# Altium PCB busanaliz.PcbDoc
Units mm, origin at the board's own origin, x right, y up, seen from the top; angles counter-clockwise.
Board outline 98.81 x 59.56 mm, 2 copper layers (Top Layer, Bottom Layer); 69 components, 54 nets, 317 pads, 84 vias.
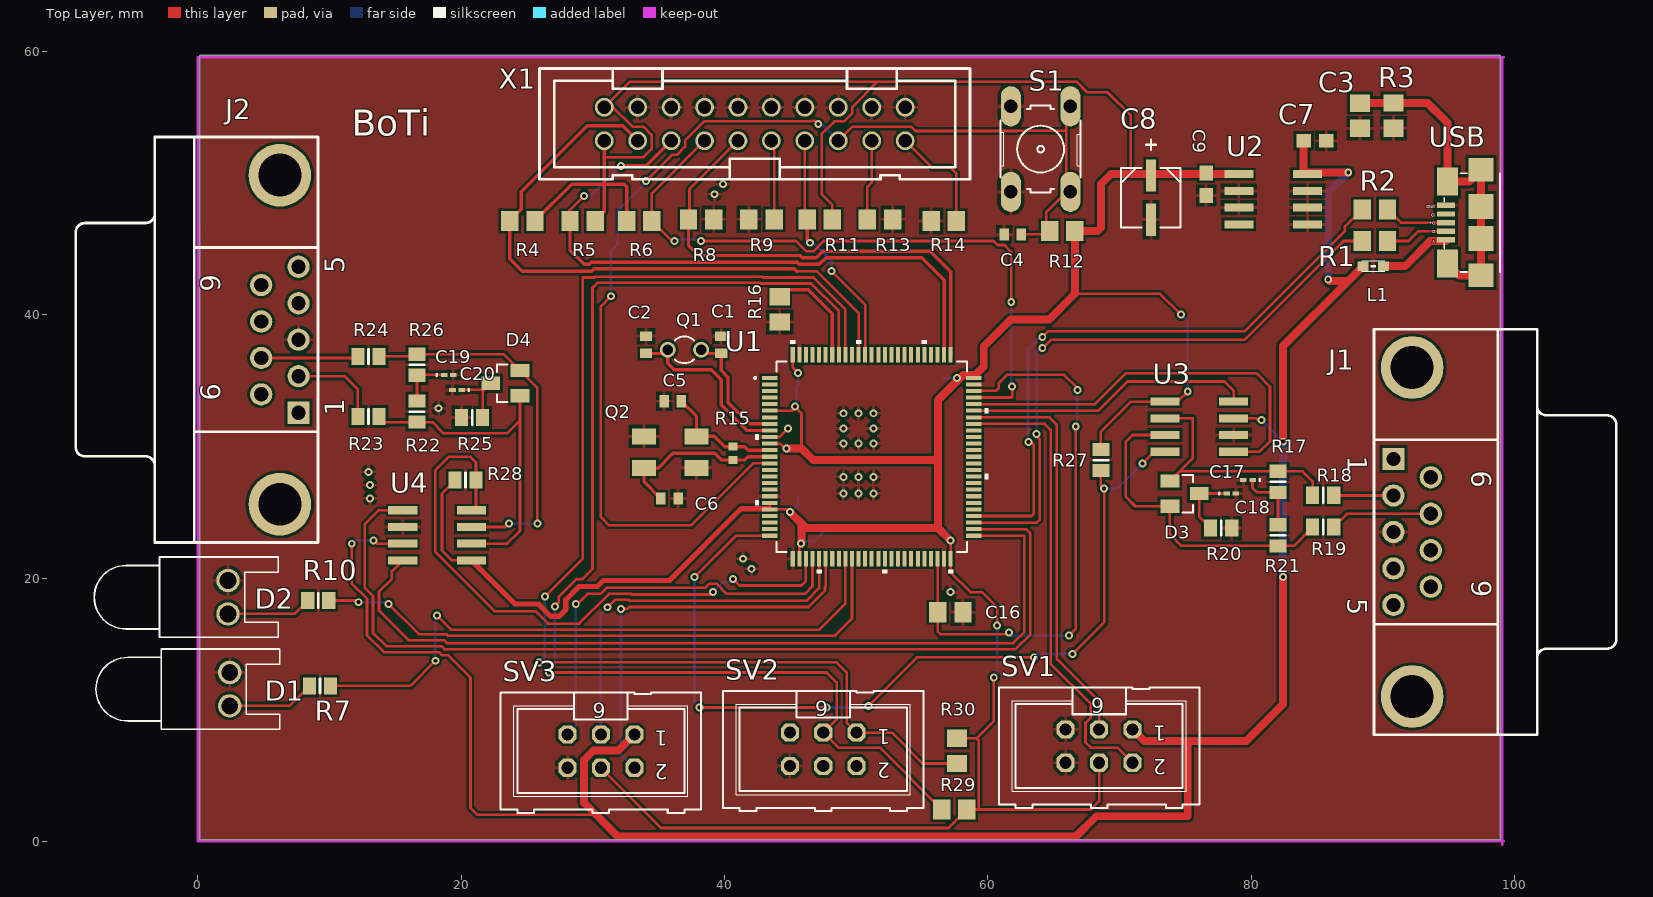
[diagram p0: Top Layer view]
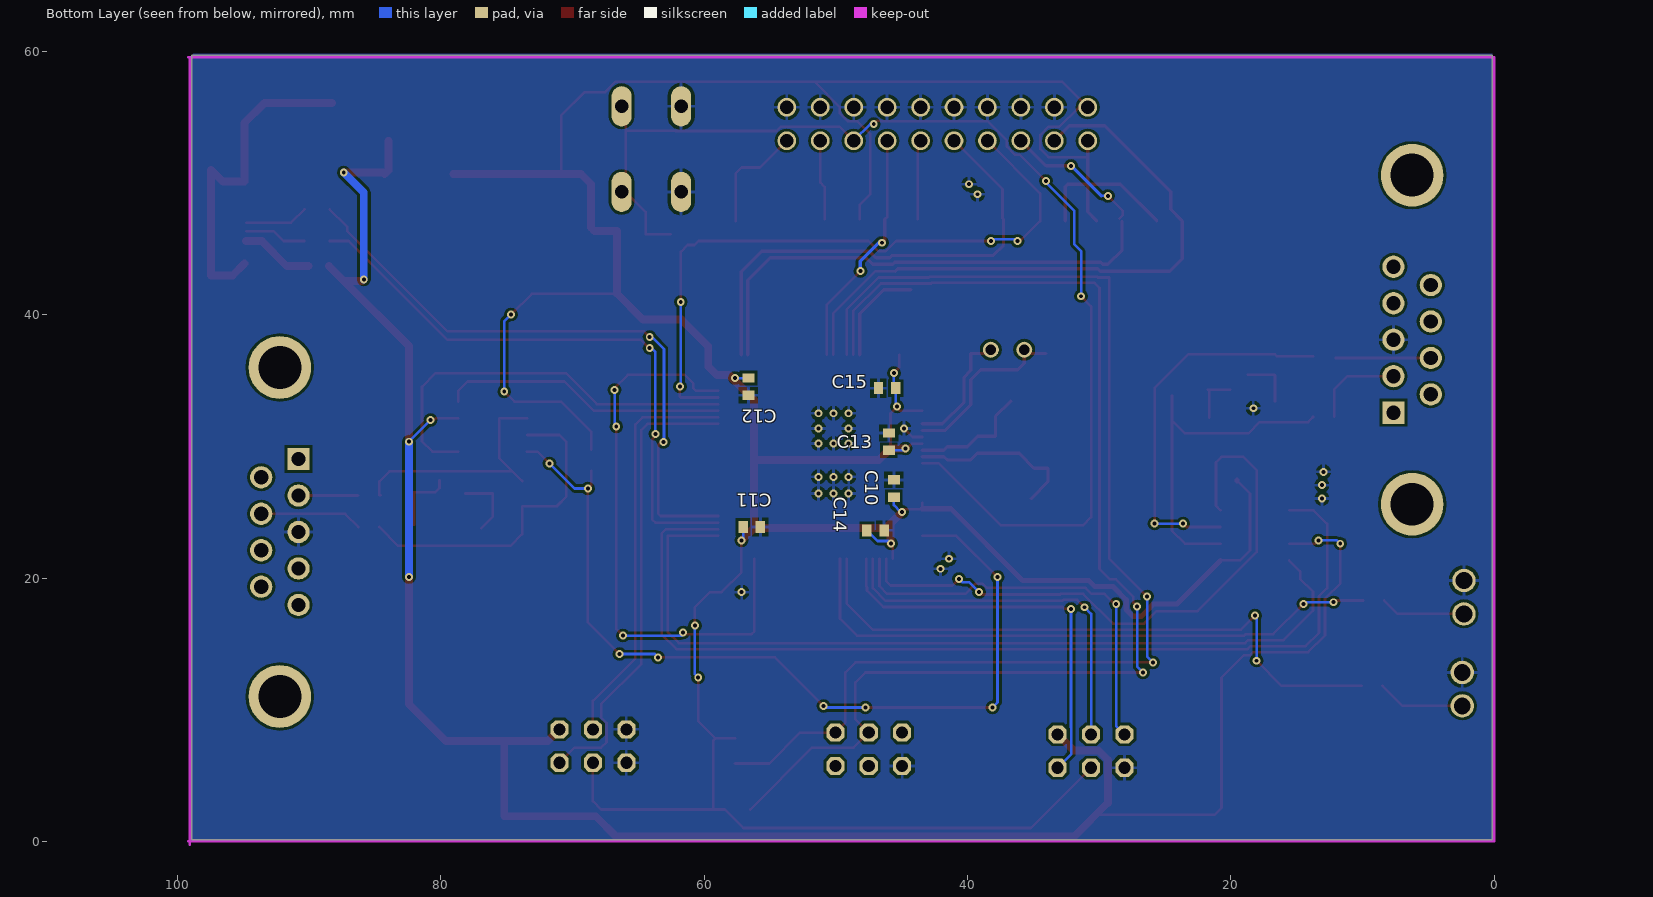
[diagram p1: Bottom Layer view, seen from below]

## Layer stack, top to bottom
Top Solder: solder mask 0.0102, Solder Resist, Dk 3.5
Top Layer: signal copper 0.0356
Dielectric 1: dielectric 0.32, FR-4, Dk 4.8
Bottom Layer: signal copper 0.0356
Bottom Solder: solder mask 0.0102, Solder Resist, Dk 3.5

## Board outline
0.127,0.127 98.933,0.127 98.933,59.69 0.127,59.69

## Design rules (kind name [scope] priority, off if disabled: settings)
Clearance [All] p1: gap=0.2 ignorepadtopadclearanceinfootprint=TRUE
PolygonConnect [All] p1: connectstyle=Relief reliefconductorwidth=0.254 reliefentries=4 polygonreliefangle="90 Angle" airgapwidth=0.254
RoutingVias [All] p1: holewidth=0.3 width=0.6 viastyle="Through Hole" minholewidth=0.3 minwidth=0.6 maxholewidth=0.3 maxwidth=0.6
SolderMaskExpansion [All] p1: expansion=0.102
Width [All] p1: maxlimit=0.6 minlimit=0.2 preferedwidth=0.2 minimp=50.000000 maximp=50.000000 favimp=50.000000
30 further rules are at their usual default settings.

## Components (designator, comment, footprint, x,y, rotation, side; value= is the part's Value field where it differs from the comment)
C1 "10p" C0402 39.751,37.719 r270 top
C2 "10p" C0402 34.036,37.719 r270 top
C3 "4.7n" C0805 88.265,55.118 r270 top
C4 "100n" C0402 61.9,46.101 r180 top
C5 "20p" C0402 36.068,33.427 r180 top
C6 "20p" C0402 35.814,26.035 r0 top
C7 "100n" C0603 84.836,53.213 r0 top
C8 "2.2u" CAPAE430X610N 72.39,48.895 r270 top
C9 "100n" C0603 76.581,49.911 r270 top
C10 "100n" C0402 45.593,26.797 r90 bottom
C11 "100n" C0402 56.388,23.876 r180 bottom
C12 "100n" C0402 56.642,34.544 r270 bottom
C13 "100n" C0402 45.974,30.353 r90 bottom
C14 "100n" C0402 46.99,23.622 r180 bottom
C15 "100n" C0402 46.101,34.417 r0 bottom
C16 "2.2u" C0805 57.15,17.399 r0 top
C17 "10n" 0603#1 79.756,27.432 r180 top
C18 "330n" 0603#1 78.486,26.416 r0 top
C19 "10n" 0603#1 19.05,35.433 r0 top
C20 "330n" 0603#1 19.685,34.29 r180 top
D1 "LED0" LED-0 2.413,11.557 r270 top
D2 "LED1" LED-0 2.286,18.542 r270 top
D3 "MMBZ27VCLT1G" SOT23 74.803,26.416 r270 top
D4 "MMBZ27VCLT1G" SOT23 23.495,34.798 r90 top
J1 "DB9 CAN1" DSUB1.385-2H9 101.727,23.495 r270 top
J2 "DB9 CAN2" DSUB1.385-2H9 -3.275,38.1 r90 top
L1 "WE-CBF_0603" 0603#2 89.281,43.688 r180 top
Q1 "32k" TC26V 36.957,37.338 r180 top
Q2 "ABM3B" ABM3B 38.789,31.369 r180 top
R1 "10" R0805 89.408,45.593 r180 top
R2 "10" R0805 89.408,48.006 r180 top
R3 "1M" R0805 90.805,55.118 r90 top
R4 "10k" R0805 24.638,47.117 r0 top
R5 "10k" R0805 29.21,47.117 r0 top
R6 "10k" R0805 33.528,47.117 r180 top
R7 "Res2" 6-0805_L 9.271,11.811 r180 top value=100
R8 "10k" R0805 38.227,47.244 r180 top
R9 "10k" R0805 42.799,47.244 r0 top
R10 "Res2" 6-0805_L 9.144,18.288 r180 top value=100
R11 "10k" R0805 47.244,47.244 r180 top
R12 "10k" R0805 65.659,46.355 r180 top
R13 "10k" R0805 51.816,47.244 r180 top
R14 "10k" R0805 56.642,47.117 r0 top
R15 "1M" R0402 40.64,29.464 r90 top
R16 "10k" R0805 44.196,40.394 r90 top
R17 "Res2" 6-0805_L 82.042,27.305 r90 top value=62
R18 "Res2" 6-0805_L 85.471,26.289 r0 top value=0.100
R19 "Res2" 6-0805_L 85.471,23.876 r0 top value=0.100
R20 "Res2" 6-0805_L 77.724,23.787 r180 top value=470k
R21 "Res2" 6-0805_L 82.042,23.241 r90 top value=62
R22 "Res2" 6-0805_L 16.637,32.639 r270 top value=62
R23 "Res2" 6-0805_L 12.954,32.258 r180 top value=0.100
R24 "Res2" 6-0805_L 12.954,36.83 r180 top value=0.100
R25 "Res2" 6-0805_L 20.828,32.184 r0 top value=470k
R26 "Res2" 6-0805_L 16.637,36.195 r270 top value=62
R27 "Res2" 6-0805_L 68.58,28.956 r90 top value=3.3k
R28 "Res2" 6-0805_L 20.32,27.447 r180 top value=3.3k
R29 "10k" R0805 57.447,2.413 r0 top
R30 "10k" R0805 57.658,6.858 r90 top
S1 "10-XX" B3F-10XX 64.008,52.578 r90 top
SV1 "ML6" ML6 68.453,7.239 r180 top
SV2 "ML6" ML6 47.498,6.985 r180 top
SV3 "ML6" ML6 30.607,6.858 r180 top
U1 "STM32H7x3VIT" LQFP100-14x14mm 51.181,29.21 r0 top value=Value
U2 "KF33D" SO8#1 81.661,48.768 r270 top
U3 "TJA1044" SO8#2 75.946,31.623 r90 top
U4 "TJA1044" SO8#2 18.288,23.114 r270 top
USB "USB_MICROB" USB_MICROB_PACKAGE 94.107,46.99 r90 top
X1 "2520-" PAK100/2500-20 42.291,54.483 r0 top

## Footprints (in the part's own frame and the unit in brackets; to place one, negate y for a bottom-side part, rotate by r counter-clockwise, add the part's x,y. Pads: shape width x height; smd on the part's side, far side on the other; paste and mask are expansions set on the pad)
6-0805_L [mm] "Chip Resistor, Body 2.0x1.2mm, IPC High Density"
  rect 1x1.3 smd: 1(-0.8,0) 2(0.8,0)
  silkscreen extent 0,-0.55 0,0.55, body extent -1.07,-0.7 1.07,0.7, height 0.7
0603#1 [mm] "Chip Inductor, Body 0.6x0.3mm, IPC High Density"
  rect 0.5x0.3 smd: 1(-0.35,0) 2(0.35,0)
  silkscreen extent -0.9,-0.05 -0.9,0.05, body extent -0.33,-0.18 0.33,0.18, height 0.55
0603#2 [mm]
  rect 0.864x0.711 smd: 1(-0.775,0) 2(0.787,0)
  silkscreen extent -0.85,-0.4 0.86,0.41
ABM3B [mil]
  rect 71x48 smd: P$1(36,24) P$2(193,24) P$3(193,119) P$4(36,119)
B3F-10XX [mil]
  oval 120x60 hole 40: 1(-128,89) 2(128,89) 3(-128,-89) 4(128,-89)
  silkscreen extent -130,-120 130,120
C0402 [mil]
  rect 28x36 smd: 1(-25.59,0) 2(26,0)
C0603 [mil]
  rect 44x40 smd: 1(-33.46,0) 2(34,0)
C0805 [mil]
  rect 52x60 smd: 1(-37.4,0) 2(38,0)
CAPAE430X610N [mil]
  rect 97x30 smd: 1(-66,0) 2(66,0)
  silkscreen extent -173,-89 89,89
DSUB1.385-2H9 [mm] "Connector; D Subminiature; 9 Position; Right Angle; Pitch 1.385 mm"
  rect 1.69x1.69 hole 1.09: 1(-5.54,-10.92)
  round 1.69 hole 1.09: 2(-2.77,-10.92) 3(0,-10.92) 4(2.77,-10.92) 5(5.54,-10.92) 6(-4.155,-8.08) 7(-1.385,-8.08) 8(1.385,-8.08) 9(4.155,-8.08)
  round 4.76 hole 3.26: 10(-12.495,-9.5) 11(12.495,-9.5)
  silkscreen extent -15.4,-12.4 15.4,6
LED-0 [mil] "LED; 2 Leads"
  round 70 hole 50: 1(50,0) 2(-50,0)
  silkscreen extent -120,-400 120,150
LQFP100-14x14mm [mil]
  rect 47x12 smd: 1(-305.12,236.22) 2(-305.12,216.54) 3(-305.12,196.85) 4(-305.12,177.17) 5(-305.12,157.48) 6(-305.12,137.8) 7(-305.12,118.11) 8(-305.12,98.43) 9(-305.12,78.74) 10(-305.12,59.06) 11(-305.12,39.37) 12(-305.12,19.69) 13(-305.12,0) 14(-305.12,-19.68) 15(-305.12,-39.37) 16(-305.12,-59.06) 17(-305.12,-78.74) 18(-305.12,-98.43) 19(-305.12,-118.11) 20(-305.12,-137.8) 21(-305.12,-157.48) 22(-305.12,-177.17) 23(-305.12,-196.85) 24(-305.12,-216.54) 25(-305.12,-236.22) 51(305.12,-236.22) 52(305.12,-216.54) 53(305.12,-196.85) 54(305.12,-177.17) 55(305.12,-157.48) 56(305.12,-137.8) 57(305.12,-118.11) 58(305.12,-98.43) 59(305.12,-78.74) 60(305.12,-59.06) 61(305.12,-39.37) 62(305.12,-19.68) 63(305.12,0) 64(305.12,19.68) 65(305.12,39.37) 66(305.12,59.06) 67(305.12,78.74) 68(305.12,98.43) 69(305.12,118.11) 70(305.12,137.8) 71(305.12,157.48) 72(305.12,177.17) 73(305.12,196.85) 74(305.12,216.54) 75(305.12,236.22)
  rect 12x47 smd: 26(-236.22,-305.12) 27(-216.54,-305.12) 28(-196.85,-305.12) 29(-177.17,-305.12) 30(-157.48,-305.12) 31(-137.8,-305.12) 32(-118.11,-305.12) 33(-98.43,-305.12) 34(-78.74,-305.12) 35(-59.06,-305.12) 36(-39.37,-305.12) 37(-19.68,-305.12) 38(0,-305.12) 39(19.68,-305.12) 40(39.37,-305.12) 41(59.06,-305.12) 42(78.74,-305.12) 43(98.43,-305.12) 44(118.11,-305.12) 45(137.8,-305.12) 46(157.48,-305.12) 47(177.17,-305.12) 48(196.85,-305.12) 49(216.54,-305.12) 50(236.22,-305.12) 76(236.22,305.12) 77(216.54,305.12) 78(196.85,305.12) 79(177.17,305.12) 80(157.48,305.12) 81(137.8,305.12) 82(118.11,305.12) 83(98.43,305.12) 84(78.74,305.12) 85(59.06,305.12) 86(39.37,305.12) 87(19.68,305.12) 88(0,305.12) 89(-19.68,305.12) 90(-39.37,305.12) 91(-59.06,305.12) 92(-78.74,305.12) 93(-98.43,305.12) 94(-118.11,305.12) 95(-137.8,305.12) 96(-157.48,305.12) 97(-177.17,305.12) 98(-196.85,305.12) 99(-216.54,305.12) 100(-236.22,305.12)
  silkscreen extent -351,-349 349,349, body extent 0,0 10,10, height 10
ML6 [mil]
  oct 54x54 hole 36: 1(-100,-50) 2(-100,50) 3(0,-50) 4(0,50) 5(100,-50) 6(100,50)
  silkscreen extent -300,-175 300,185
PAK100/2500-20 [mil]
  round 56 hole 40: 1(-450,-50) 2(-450,50) 3(-350,-50) 4(-350,50) 5(-250,-50) 6(-250,50) 7(-150,-50) 8(-150,50) 9(-50,-50) 10(-50,50) 11(50,-50) 12(50,50) 13(150,-50) 14(150,50) 15(250,-50) 16(250,50) 17(350,-50) 18(350,50) 19(450,-50) 20(450,50)
  silkscreen extent -644,-165 644,166
R0402 [mil]
  rect 24x28 smd: 1(-19.68,0) 2(20,0)
R0805 [mil]
  rect 52x60 smd: 1(-37.4,0) 2(38,0)
SO8#1 [mil]
  rect 24x87 smd: 1(-75,-102.36) 2(-25,-102.36) 3(25,-102.36) 4(75,-102.36) 5(75,103) 6(25,103) 7(-25,103) 8(-75,103)
SO8#2 [mil]
  rect 24x87 smd: 1(-80,-107.36) 2(-30,-107.36) 3(20,-107.36) 4(70,-107.36) 5(70,98) 6(20,98) 7(-30,98) 8(-80,98)
SOT23 [mil]
  rect 40x56 smd: 1(-37.4,-38.31) 2(38,-38.31) 3(0,49)
  silkscreen extent -56,-1 56,31
TC26V [mil]
  round 48 hole 32: 1(-50,0) 2(50,0)
  silkscreen extent -28,-40 29,40
USB_MICROB_PACKAGE [mil]
  rect 16x54 smd: D+(0,-26.77) D-(-25.2,-26.77) GND(52,-26.77) ID(26,-26.77) V(-51.18,-26.77)
  rect 83x63 smd: PAD1(-122.05,-31.5) PAD2(123,-31.5)
  rect 71x75 smd: PAD3(-157.48,-131.89) PAD6(158,-131.89)
  rect 75x75 smd: PAD4(-47.24,-131.89) PAD5(48,-131.89)
  silkscreen extent -148,-189 148,-22

## Part data
C1 C2 C4 C5 C6 C10 C11 C12 C13 C14 C15 C17 C18 C19 C20: library part C-EUC0402, "<B>CAPACITOR</B>, European symbol", SPICEPREFIX=C
C3: library part C-EUC0805, "<B>CAPACITOR</B>, European symbol", SPICEPREFIX=C
C7 C9: library part C-EUC0603, "<B>CAPACITOR</B>, European symbol", SPICEPREFIX=C
C8: library part EEE--CASE-B, MPN=EEE-FT0J101AR, PACKAGE=CASE-B, TOLERANCE="±20 %", VOLTAGERATING=6.3V, OC_FARNELL=2065951, OC_NEWARK=73T9146, SUPPLIER=PANASONIC
C16: library part C-EUC0805, SPICEPREFIX=C
D1: "Typical INFRARED GaAs LED", LatestRevisionDate=08-Jul-2005, LatestRevisionNote="Mech Layer 1 removed.", PackageDescription="LED; 2 Leads", PackageReference=LED-0, Published=8-Jun-2000, Publisher="Altium Limited"
D2: library part LED0, "Typical INFRARED GaAs LED", LatestRevisionDate=08-Jul-2005, LatestRevisionNote="Mech Layer 1 removed.", PackageDescription="LED; 2 Leads", PackageReference=LED-0, Published=8-Jun-2000, Publisher="Altium Limited"
J1 J2: library part "D Connector 9", "Receptacle Assembly, 9 Position, Right Angle", PackageDocument=O, DatasheetDocument=1-Sep-1999, Gender=Receptacle, LatestRevisionDate=17-Jul-2002, LatestRevisionNote="Re-released for DXP Platform.", Orientation="Right Angle", PackageReference=788750, Positions=9, Published=15-Jun-2001, Publisher="Altium Limited"
L1: "<b> SMD EMI Suppression Ferrite Beads WE-CBF</b> <p> /  / - Excellent anti-EMI properties <br> / - Low DC-restistance <br> / - Impedances till 3000 ohms <br> / - Rated current up to 6 A<p> /  / -- Reliable Ni-Sn electrodes<br> / -- Perfect as data lined filter and for uncoupling of distribution voltage<br>", MPN=742792695, PACKAGE=IND-0603, OC_FARNELL=1635699, OC_NEWARK=08P2449, SUPPLIER="Wuerth Elektronik"
Q1: library part CRYSTALTC26V, "<b>CRYSTAL</b>", 1=1, 2=2, OC_FARNELL=unknown, OC_NEWARK=unknown
R1 R2 R3 R4 R5 R6 R8 R9 R11 R12 R13 R14 R16 R29 R30: library part R-EU_R0805, "<B>RESISTOR</B>, European symbol"
R7 R10 R17 R18 R19 R20 R21 R22 R23 R24 R25 R26 R27 R28: "Resistor", LatestRevisionDate=17-Jul-2002, LatestRevisionNote="Re-released for DXP Platform.", PackageDescription="Axial Device, Thru-Hole; 2 Leads; 0.4 in Pin Spacing", PackageReference=AXIAL-0.4, Published=8-Jun-2000, Publisher="Altium Limited"
R15: library part R-EU_R0402, "<B>RESISTOR</B>, European symbol"
S1: "<b>OMRON SWITCH</b>", MPN=B3F-1000, OC_FARNELL=176432, OC_NEWARK=36M3542
SV1 SV2 SV3: "<b>HARTING</b>", OC_FARNELL=unknown, OC_NEWARK=unknown
U1: "Imported", MANUFACTURER_PART_NUMBER=stm32h7x3vit, Copyright="Copyright (C) 2016 Accelerated Designs. All rights reserved", RefDes=RefDes, Type=DEV, VENDOR=STMicroelectronics
USB: "This is the hirose ZX62-B-5PA(11) MICRO-USB B Type female connection.", USB=USB
X1: "<b>3M (TM) Pak 100 4-Wall Header</b><p> / Source: 3M", OC_FARNELL=unknown, OC_NEWARK=unknown

## Via types
v1: diameter 0.6, hole 0.3, Top Layer to Bottom Layer, 84 vias

## Nets (pads, with @x,y where several pads share a name; then routed paths per layer and width w, separated by ;. In a path a pad name is that pad's centre, name@x,y a point inside that pad or via, vN(x,y) a via of type N, cw(c..) or ccw(c..) an arc to the next point about the centre after c; other vN are vias at no path point)
+3V3: C8.1 C9.1 C10.1 C11.1 C12.1 C13.1 C14.1 C15.1 R4.2 R5.2 R6.2 R11.1 R12.1 R27.2 R28.2 R29.2 R30.2 SV1.4 SV3.4 U1.6 U1.11 U1.20 U1.21 U1.27 U1.50 U1.75 U1.100 U2.1 U3.5 U4.5 X1.1 X1.2 | length 307.8
  Top Layer w0.2: R28.2@19.52,27.394 18.542,26.416 18.542,22.098 19.304,21.336 U4.5 ; SV3.4 35.179,1.016 57.023,1.016 R29.2@58.412,2.405 ; 30.88,51.962 33.85,51.962 34.466,52.578 34.466,53.654 33.842,54.278 33.016,54.278 31.541,55.753 X1.2 32.815,57.707 51.629,57.707 ; U1.20 43.431,25.262 U1.21 v1@44.894,25.21 ; U1.11 44.212,30.21 44.577,29.845 v1(44.704,29.845) ; U1.6 45.156,32.71 45.339,32.893 v1(45.339,33.02) 45.847,32.512 45.847,29.845 ; U1.100 45.181,35.972 v1(45.593,35.56) ; U1.27 45.681,22.44 45.847,22.606 45.842,22.611 v1(45.799,22.611) ; R11.1 48.194,48.326 47.371,49.149 47.371,53.721 48.338,54.688 49.082,54.688 49.706,55.312 49.706,55.785 51.629,57.707 ; v1(57.15,22.86) 57.023,22.86 57.181,22.702 U1.50 57.181,20.416 58.674,18.923 59.563,18.923 60.706,17.78 v1(60.706,16.383) ; R30.2 59.131,7.823 ; R29.2 59.309,2.413 ; v1(60.452,12.446) 60.452,9.144 59.131,7.823 ; 66.609,41.59 73.091,41.59 v1(74.676,40.005) ; SV1.4 68.453,3.048 67.818,2.413 59.309,2.413 ; R27.2 68.58,31.115 70.866,33.401 U3.5 74.422,33.401 v1(75.184,34.163) ; 70.866,50.673 70.866,55.118 69.088,56.896 67.542,56.896 66.731,57.707 51.629,57.707 ; 59.131,7.823 59.309,7.645 59.309,2.413
  Top Layer w0.254: R4.2 28.397,49.911 30.861,49.911 ; R5.2 30.861,47.803 30.861,49.911 ; X1.1 30.861,49.911 ; R6.2 32.563,49.733 32.385,49.911 30.861,49.911
  Top Layer w0.4: R28.2@19.52,27.394 R28.2 ; U4.5 24.079,18.034 25.858,18.034 26.802,17.09 27.427,17.09 27.948,17.611 27.948,18.346 28.952,19.35 30.335,19.35 30.789,19.804 35.806,19.804 41.264,25.262 U1.21@43.431,25.262
  Top Layer w0.6: v1(44.704,29.845) 45.847,29.845 46.736,28.956 56.216,28.956 ; v1(44.958,25.019) 45.842,24.135 ; v1@45.842,22.611 45.842,24.135 ; v1(57.15,22.86) 56.216,23.794 ; U2.1 70.866,50.673 69.342,50.673 68.58,49.911 68.58,46.609 68.326,46.355 R12.1 66.609,41.59 64.643,39.624 61.722,39.624 59.69,37.592 59.69,36.068 59.038,35.416 58.105,35.416 56.216,33.528 56.216,28.956 ; 45.842,24.135 46.183,23.794 56.216,23.794 ; 56.216,23.794 56.216,28.956
  Bottom Layer w0.2: v1@44.846,29.703 C13.1 ; v1(44.958,25.019) 45.085,25.019 45.593,25.527 C10.1 ; v1(45.339,33.02) 45.451,33.132 C15.1 45.451,34.544 45.593,34.686 v1(45.593,35.56) ; v1(45.799,22.611) 45.999,22.811 46.832,22.811 47.64,23.619 C14.1 ; C12.1@56.657,35.179 v1(57.658,35.179) ; C11.1 57.038,22.972 v1(57.15,22.86) ; v1(60.452,12.446) 60.706,12.7 v1(60.706,16.383) ; v1(74.676,40.005) 75.184,39.497 v1(75.184,34.163)
+5V: C7.1 L1.2 SV1.1 SV3.1 U2.8 U3.3 U4.3 | length 170.4
  Top Layer w0.2: v1(11.684,22.606) 11.684,19.594 12.846,18.432 12.846,15.65 14.126,14.37 18.305,14.37 18.533,14.142 19.005,14.142 20.701,12.446 20.701,2.54 21.209,2.032 29.972,2.032 ; v1(13.335,22.86) 13.589,22.606 U4.3 ; U3.3 80.391,32.131 80.518,32.004 v1(80.772,32.004)
  Top Layer w0.6: SV3.1 31.907,6.888 30.035,6.888 29.337,6.191 29.337,2.921 31.896,0.362 66.692,0.362 68.235,1.905 75.184,1.905 75.184,7.62 ; SV1.1 71.882,7.62 75.184,7.62 ; v1(82.423,20.066) 82.423,10.414 79.629,7.62 75.184,7.62 ; v1(82.423,30.353) 82.423,37.617 87.351,42.545 ; C7.1 83.986,50.964 U2.8 ; U2.8@84.404,50.8 v1(87.376,50.8) ; v1(85.852,42.672) 85.979,42.545 87.351,42.545 ; L1.2 87.351,42.545
  Bottom Layer w0.2: v1(11.684,22.606) 11.938,22.86 v1(13.335,22.86) ; v1(80.772,32.004) v1(82.423,30.353)
  Bottom Layer w0.6: v1(82.423,20.066) v1(82.423,30.353) ; v1(85.852,42.672) 85.852,49.276 v1(87.376,50.8)
CAN1_H: J1.7 R19.2 | length 7.8
  Top Layer w0.2: R19.2 87.275,24.88 J1.7
CAN1_L: J1.2 R18.2 | length 4.5
  Top Layer w0.2: R18.2@86.295,26.265 J1.2
CAN2_H: J2.7 R24.2 | length 7.2
  Top Layer w0.2: J2.7 R24.2@12.039,36.715
CAN2_L: J2.2 R23.2 | length 7
  Top Layer w0.2: J2.2 11.152,35.33 12.154,34.328 R23.2
DGND: C1.1 C2.1 C3.2 C4.2 C5.2 C6.2 C7.2 C8.2 C9.2 C10.2 C11.2 C12.2 C13.2 C14.2 C15.2 C16.2 C17.2 C18.2 C19.2 C20.2 D1.2 D2.2 J1.3 J2.3 Q2.P$2 Q2.P$4 R3.1 R8.1 R9.1 R13.1 R14.1 R16.1 R20.1 R25.1 S1.1 S1.2 SV1.5 SV1.6 SV2.6 SV3.6 U1.10 U1.19 U1.26 U1.49 U1.74 U1.99 U2.2 U2.3 U2.5 U2.6 U2.7 U3.2 U4.2 USB.GND X1.4 X1.6 X1.8 X1.10 X1.12 X1.14 X1.16 X1.18 X1.20 | length 1.7
  Top Layer w0.2: U1.10 44.172,30.71 v1(44.831,31.369)
  other v1: 57.15,18.923 42.037,20.701 41.402,21.463 13.081,26.035 49.022,26.416 50.165,26.416 51.308,26.416 13.081,27.051 49.022,27.686 50.165,27.686 51.308,27.686 12.954,28.067 49.022,30.226 50.165,30.226 51.308,30.226 49.022,31.369 51.308,31.369 49.022,32.512 50.165,32.512 51.308,32.512 18.288,32.893 39.243,49.149 39.878,49.911
FD1_CANRX: U1.70 U3.4 | length 21.8
  Top Layer w0.2: U1.70 68.397,32.71 70.612,34.925 77.978,34.925 78.673,34.23 U3.4
FD1_CANTX: U1.71 U3.1 | length 31.1
  Top Layer w0.2: U1.71 68.135,33.21 70.485,35.56 80.391,35.56 81.426,34.525 81.426,30.372 80.645,29.591 U3.1
FD1_STBM: R27.1 U1.25 U3.8 | length 67.9
  Top Layer w0.2: v1(37.719,20.066) 40.863,23.21 U1.25 ; v1(38.1,10.16) v1(47.752,10.16) ; v1(50.927,10.287) 54.61,13.97 v1(63.5,13.97) ; v1(66.421,14.224) 68.834,16.637 v1(68.834,26.797) 68.58,27.051 R27.1 ; v1(71.755,28.702) 72.644,29.591 U3.8
  Bottom Layer w0.2: v1(37.719,20.066) 37.719,10.541 v1(38.1,10.16) ; v1(47.752,10.16) 50.8,10.16 v1(50.927,10.287) ; v1(63.5,13.97) 63.754,14.224 v1(66.421,14.224) ; v1(68.834,26.797) 69.85,26.797 v1(71.755,28.702)
FD2_CANRX: U1.51 U4.4 | length 66.1
  Top Layer w0.2: U4.4 14.732,20.507 14.732,19.939 13.754,18.961 13.754,17.514 15.99,15.278 18.681,15.278 18.909,15.05 61.912,15.05 62.769,15.906 62.769,23.21 U1.51
FD2_CANTX: U1.52 U4.1 | length 74.8
  Top Layer w0.2: U4.1 13.716,25.146 12.681,24.111 12.681,19.239 13.3,18.62 13.3,15.838 14.314,14.824 18.493,14.824 18.721,14.596 62.101,14.596 63.223,15.718 63.223,23.398 62.911,23.71 U1.52
FD2_STBM: R28.1 U1.28 U4.8 | length 47.6
  Top Layer w0.2: U4.8 21.12,25.489 R28.1 21.12,28.791 20.701,29.21 19.05,29.21 18.034,28.194 18.034,21.964 22.518,17.48 25.628,17.48 26.573,16.536 28.946,16.536 31.206,18.796 32.908,18.796 32.954,18.75 38.943,18.75 v1(39.116,18.923) ; v1(40.64,19.939) 41.148,19.431 45.847,19.431 46.181,19.765 U1.28
  Bottom Layer w0.2: v1(39.116,18.923) 39.878,19.685 40.386,19.685 v1(40.64,19.939)
I2C_SCL: R30.1 SV2.1 U1.92 | length 92.2
  Top Layer w0.2: v1(25.908,13.589) 48.514,13.589 49.276,12.827 49.276,9.017 SV2.1 52.705,8.255 55.052,5.908 R30.1 ; v1(26.352,18.605) 29.237,21.49 29.237,42.826 30.119,42.826 30.165,42.872 42.893,42.872 42.939,42.826 43.098,42.826 43.099,42.827 45.293,42.827 45.294,42.826 46.761,42.826 49.181,40.406 U1.92
  Bottom Layer w0.2: v1(25.908,13.589) 26.352,14.034 v1(26.352,18.605)
I2C_SDA: R29.1 SV2.3 U1.93 | length 91.7
  Top Layer w0.2: v1(26.67,12.827) 47.752,12.827 48.514,12.065 48.514,9.271 SV2.3 48.641,7.112 51.798,7.112 R29.1 ; v1(27.114,17.843) 27.394,18.123 27.394,18.576 28.722,19.904 29.175,19.904 29.972,20.701 29.972,42.037 30.353,42.418 42.705,42.418 42.751,42.372 43.286,42.372 43.287,42.373 45.105,42.373 45.106,42.372 46.573,42.372 48.681,40.264 U1.93
  Bottom Layer w0.2: v1(26.67,12.827) 27.114,13.271 v1(27.114,17.843)
JNTRST: R4.1 U1.90 X1.3 | length 48.3
  Top Layer w0.2: 45.477,43.308 46.989,43.308 50.181,40.116 U1.90
  Top Layer w0.254: X1.3 32.258,54.356 29.591,54.356 24.562,49.327 24.562,47.991 R4.1 23.688,44.257 24.638,43.307 29.92,43.307 30.094,43.482 45.304,43.482 45.477,43.308
JTCLK: R8.2 U1.76 X1.9 | length 36.9
  Top Layer w0.2: R8.2@37.338,47.32 37.338,49.53 X1.9
  Top Layer w0.254: R8.2 37.262,45.288 38.052,44.498 45.725,44.498 45.891,44.331 46.952,44.331 47.452,44.831 55.626,44.831 57.181,43.276 U1.76
JTDI: R5.1 U1.77 X1.5 | length 48.4
  Top Layer w0.2: R5.1@28.448,47.305 28.194,47.559 28.194,47.879 v1(29.337,49.022)
  Top Layer w0.254: R5.1 28.26,44.892 29.329,43.823 29.717,43.823 29.884,43.99 45.514,43.99 45.681,43.823 47.212,43.823 47.712,44.323 54.991,44.323 56.681,42.633 U1.77 ; v1(32.131,51.308) 34.036,51.308 X1.5
  Bottom Layer w0.2: v1(29.337,49.022) 29.845,49.022
  Bottom Layer w0.254: 29.845,49.022 v1(32.131,51.308)
JTDO: R11.2 U1.89 X1.13 | length 18.4
  Top Layer w0.2: X1.13 46.101,47.422 R11.2 ; v1(48.133,43.307) 50.681,40.759 50.681,40.124 U1.89
  Top Layer w0.254: R11.2 46.279,45.669 v1(46.482,45.466)
  Bottom Layer w0.254: v1(46.482,45.466) 46.609,45.593 48.133,44.069 v1(48.133,43.307)
JTMS: R6.1 U1.72 X1.7 | length 51
  Top Layer w0.2: v1(36.195,45.593) 36.002,45.593 R6.1 34.478,49.21 X1.7 ; v1(38.227,45.593) 45.43,45.593 46.211,44.812 46.753,44.812 47.534,45.593 60.434,45.593 60.737,45.29 61.263,45.29 61.777,44.776 v1(61.777,40.966) v1@61.777,40.949 ; U1.72 61.777,33.71 61.849,33.782 v1(61.849,34.544)
  Bottom Layer w0.2: v1(36.195,45.593) 36.322,45.72 38.227,45.72 v1(38.227,45.593) ; v1(61.777,40.966) 61.777,34.616 v1(61.849,34.544) v1@61.976,34.417
LED0: R7.1 U1.34 | length 48.1
  Top Layer w0.2: R7.1 16.129,11.811 v1(18.034,13.716) v1@18.161,13.843 ; v1(18.161,17.145) 19.224,16.082 47.197,16.082 49.181,18.066 U1.34
  Bottom Layer w0.2: v1(18.034,13.716) 18.034,17.018 v1(18.161,17.145)
LED1: R10.1 U1.35 | length 45.9
  Top Layer w0.2: R10.1 12.065,18.288 v1(12.192,18.161) ; v1(14.478,18.034) 16.78,15.732 18.869,15.732 18.974,15.628 48.394,15.628 49.681,16.915 U1.35
  Bottom Layer w0.2: v1(12.192,18.161) 14.351,18.161 v1(14.478,18.034)
NetC1_2: C1.2 Q1.1 U1.8 | length 9.4
  Top Layer w0.254: Q1.1 38.506,37.059 C1.2 39.751,35.77 40.259,35.262 40.259,33.357 41.898,31.718 ; 41.95,31.71 U1.8
NetC2_2: C2.2 Q1.2 U1.9 | length 13.8
  Top Layer w0.254: C2.2 35.408,37.059 Q1.2 35.687,36.322 36.195,35.814 38.989,35.814 39.751,35.052 39.751,33.147 41.688,31.21 U1.9
NetC3_1: C3.1 R3.2 USB.PAD1 USB.PAD2 USB.PAD3 USB.PAD4 USB.PAD5 USB.PAD6 | length 25.6
  Top Layer w0.6: C3.1 90.79,56.068 R3.2 93.396,56.083 94.907,54.572 USB.PAD2 96.568,50.114 USB.PAD6 USB.PAD5 USB.PAD4 USB.PAD3 95.807,42.99 USB.PAD1
NetC5_1: C5.1 Q2.P$1 R15.2 U1.12 | length 9.1
  Top Layer w0.254: C5.1 37.874,32.271 Q2.P$1 39.218,30.759 40.005,29.972 R15.2 41.529,29.972 41.783,29.718 ; 41.791,29.71 U1.12
NetC6_1: C6.1 Q2.P$3 R15.1 U1.13 | length 13.2
  Top Layer w0.254: C6.1 33.887,27.312 Q2.P$3 34.95,28.346 36.068,29.464 39.243,29.464 39.743,28.964 R15.1 41.537,28.964 41.783,29.21 U1.13
NetC16_1: C16.1 U1.48 U1.73 | length 43.9
  Top Layer w0.2: U1.48 56.181,15.955 56.407,15.729 61.449,15.729 v1(61.595,15.875) ; U1.73 60.626,34.21 60.833,34.417 60.833,34.798 61.468,35.433 65.786,35.433 66.802,34.417 v1(66.802,34.29) ; v1(66.167,15.621) 66.675,16.129 v1(66.675,31.496)
  Bottom Layer w0.2: v1(61.595,15.875) 61.595,15.748 61.722,15.621 v1(66.167,15.621) ; v1(66.675,31.496) 66.802,31.623 v1(66.802,34.29)
NetC17_1: C17.1 R17.1 R21.2 | length 5.1
  Top Layer w0.2: C17.1 80.106,26.828 80.429,26.505 R17.1 R21.2
NetC18_1: C18.1 D3.3 R20.2 | length 5.1
  Top Layer w0.2: R20.2 76.048,24.663 D3.3 C18.1
NetC19_1: C19.1 R22.1 R26.2 | length 4
  Top Layer w0.2: R22.1 R26.2 ; R26.2@16.675,35.433 C19.1
NetC20_1: C20.1 D4.3 R25.2 | length 3.9
  Top Layer w0.2: C20.1 21.742,34.29 21.628,34.176 R25.2
NetD1_1: D1.1 R7.2 | length 6.7
  Top Layer w0.2: D1.1 6.947,10.287 R7.2
NetD2_1: D2.1 R10.2 | length 6.5
  Top Layer w0.2: D2.1 7.328,17.272 R10.2
NetD3_1: D3.1 R17.2 R18.1 U3.6 | length 19.2
  Top Layer w0.2: U3.6 75.565,32.131 75.565,29.101 74.569,28.105 ; D3.1 74.569,28.105 ; R18.1@84.582,26.289 R18.1 84.671,27.343 83.909,28.105 R17.2 74.569,28.105
NetD3_2: D3.2 R19.1 R21.1 U3.7 | length 24.9
  Top Layer w0.2: U3.7 70.993,30.861 70.485,30.353 70.485,26.162 71.196,25.451 D3.2 73.83,23.325 74.714,22.441 R21.1 83.236,22.441 R19.1
NetD4_1: D4.1 R22.2 R23.1 U4.6 | length 26
  Top Layer w0.2: R23.1 13.754,32.22 14.135,31.839 R22.2 17.818,31.839 18.669,30.988 23.495,30.988 24.468,31.961 ; U4.6 23.495,22.606 24.468,23.579 24.468,31.961 ; D4.1 24.468,31.961
NetD4_2: D4.2 R24.1 R26.1 U4.7 | length 28.6
  Top Layer w0.2: R24.1 16.472,36.83 R26.1 23.236,36.995 D4.2 25.781,34.45 v1(25.781,24.13) ; U4.7 23.368,23.876 v1(23.622,24.13)
  Bottom Layer w0.2: v1(23.622,24.13) v1(25.781,24.13)
NetL1_1: L1.1 USB.V | length 5.5
  Top Layer w0.6: L1.1 91.694,43.688 93.599,45.593 USB.V@94.787,45.593
NetR1_1: R1.1 USB.D- | length 4.7
  Top Layer w0.2: R1.1 91.948,45.593 92.705,46.35 USB.D-
NetR2_1: R2.1 USB.D+ | length 4.8
  Top Layer w0.2: R2.1 91.374,46.99 USB.D+
NetR9_2: R9.2 X1.11 | length 6.1
  Top Layer w0.2: X1.11 43.764,53.01 R9.2
NetR13_2: R13.2 X1.17 | length 6.1
  Top Layer w0.2: R13.2 50.851,49.708 51.181,50.038 X1.17
NetR14_2: R14.2 X1.19 | length 8.5
  Top Layer w0.2: X1.19 55.753,51.181 57.15,51.181 57.607,50.724 R14.2
NetR16_2: R16.2 U1.94 | length 7.8
  Top Layer w0.254: R16.2@44.291,41.891 46.374,41.891 48.181,40.084 U1.94
RESET: C4.1 R12.2 S1.3 S1.4 U1.14 X1.15 | length 89.9
  Top Layer w0.2: v1(31.369,41.402) 30.607,40.64 30.607,24.638 31.242,24.003 37.465,24.003 42.172,28.71 U1.14 ; v1(34.036,50.165) 36.019,52.148 36.382,52.148 37.006,52.772 37.006,53.245 38.449,54.688 46.542,54.688 46.591,54.737 46.863,54.737 v1(47.117,54.483) ; X1.15 49.706,54.278 54.162,54.278 54.489,53.951 62.21,53.951 62.233,53.975 65.964,53.975 ; C4.1 64.44,46.101 64.44,47.803 65.964,49.327 65.964,53.975 ; S1.4 65.964,55.524 65.964,53.975
  Bottom Layer w0.2: v1(31.369,41.402) 31.369,44.831 31.877,45.339 31.877,47.879 34.163,50.165 v1(34.036,50.165) ; v1(47.117,54.483) 47.371,54.483 X1.15
SPI_MISO: SV3.3 U1.30 | length 28.8
  Top Layer w0.2: v1(31.115,17.78) 31.677,18.342 32.72,18.342 32.793,18.269 46.216,18.269 47.181,19.234 U1.30
  Bottom Layer w0.2: SV3.3 30.607,17.272 v1(31.115,17.78)
SPI_MOSI: SV3.2 U1.31 | length 31
  Top Layer w0.2: v1(32.131,17.653) 32.623,17.653 32.766,17.796 46.385,17.796 47.635,19.046 47.635,19.314 47.681,19.36 U1.31
  Bottom Layer w0.2: v1(32.131,17.653) 32.131,8.641 32.107,8.618 32.107,6.628 SV3.2
SPI_SCK: SV3.5 U1.29 | length 31.4
  Top Layer w0.2: v1(28.702,18.034) 28.829,18.034 29.591,18.796 30.564,18.796 31.018,19.25 38.518,19.25 38.845,19.577 39.387,19.577 40.168,18.796 46.101,18.796 46.681,19.376 U1.29
  Bottom Layer w0.2: SV3.5 28.702,8.763 v1(28.702,18.034)
USART_RX: SV1.3 U1.69 | length 31
  Top Layer w0.2: U1.69 64.691,32.21 65.224,31.677 65.224,13.897 68.453,10.668 SV1.3
USART_TX: SV1.2 U1.68 | length 35.4
  Top Layer w0.2: U1.68 64.302,31.71 64.77,31.242 64.77,13.462 67.818,10.414 67.818,9.403 67.413,8.999 67.413,7.517 67.818,7.112 69.85,7.112 SV1.2
USB_OTG_HS_DM: R1.2 U1.53 | length 46.2
  Top Layer w0.2: U1.53 63.707,24.21 63.954,24.457 63.954,30.534 63.707,30.781 v1(63.707,30.941) ; v1(64.135,37.465) 64.206,37.465 64.847,38.106 79.515,38.106 87.002,45.593 R1.2
  Bottom Layer w0.2: v1(63.707,30.941) 63.707,37.164 64.008,37.465 v1(64.135,37.465)
USB_OTG_HS_DP: R2.2 U1.54 | length 47.4
  Top Layer w0.2: U1.54 63.318,24.71 63.5,24.892 63.5,30.099 63.262,30.337 v1(63.103,30.337) ; v1(64.135,38.319) 64.551,38.735 79.502,38.735 87.122,46.355 87.122,46.685 R2.2
  Bottom Layer w0.2: v1(63.103,30.337) 63.053,30.387 63.053,37.399 63.973,38.319 v1(64.135,38.319)
USB_OTG_HS_ID: USB.ID
pads on no net: J1.1 J1.4 J1.5 J1.6 J1.8 J1.9 J1.10 J1.11 J2.1 J2.4 J2.5 J2.6 J2.8 J2.9 J2.10 J2.11 SV2.2 SV2.4 SV2.5 U1.1 U1.2 U1.3 U1.4 U1.5 U1.7 U1.15 U1.16 U1.17 U1.18 U1.22 U1.23 U1.24 U1.32 U1.33 U1.36 U1.37 U1.38 U1.39 U1.40 U1.41 U1.42 U1.43 U1.44 U1.45 U1.46 U1.47 U1.55 U1.56 U1.57 U1.58 U1.59 U1.60 U1.61 U1.62 U1.63 U1.64 U1.65 U1.66 U1.67 U1.78 U1.79 U1.80 U1.81 U1.82 U1.83 U1.84 U1.85 U1.86 U1.87 U1.88 U1.91 U1.95 U1.96 U1.97 U1.98 U2.4

## Polygon pours and split planes (outlines as drawn)
DGND on Top Layer "Bottom Layer-GND" (solid, pour order 2): 0.254,59.563 0.381,59.69 98.933,59.69 98.933,0.381 98.552,0 0,0
DGND on Bottom Layer "Bottom Layer-GND" (solid, pour order 4): 0.127,59.817 98.806,59.817 99.06,59.563 98.933,59.436 98.933,0 0.254,0 0.127,0.127

## Keep-outs
Keep-Out Layer:
  lines w0.2: 0,0 99.187,0 ; 0,0.127 0,59.563 99.187,59.563 ; 99.06,-0.254 99.06,59.436

## Silkscreen, mask and mechanical layers (free items; w line width, h text height)
Top Overlay:
  text "BoTi" at 11.684,53.594 h2

## Text inside footprints (layer, text, board x,y; h text height)
J1: Top Overlay "1" at 87.352,29.285 h1.5 r270; Top Overlay "5" at 87.352,18.455 h1.5 r270; Top Overlay "9" at 96.752,19.84 h1.5 r270; Top Overlay "6" at 96.752,28.15 h1.5 r270
J2: Top Overlay "1" at 11.1,32.31 h1.5 r90; Top Overlay "5" at 11.1,43.14 h1.5 r90; Top Overlay "9" at 1.7,41.755 h1.5 r90; Top Overlay "6" at 1.7,33.445 h1.5 r90
S1: Mechanical 16 "1" at 62.357,48.26 h1.97 r90; Mechanical 16 "2" at 62.484,56.134 h1.97 r90; Mechanical 16 "3" at 66.802,48.006 h1.97 r90; Mechanical 16 "4" at 66.802,56.134 h1.97 r90
SV1: Top Overlay "6" at 68.834,11.303 h1.97 r180; Top Overlay "2" at 73.533,6.604 h1.97 r180; Top Overlay "1" at 73.533,9.144 h1.97 r180
SV2: Top Overlay "6" at 47.879,11.049 h1.97 r180; Top Overlay "2" at 52.578,6.35 h1.97 r180; Top Overlay "1" at 52.578,8.89 h1.97 r180
SV3: Top Overlay "6" at 30.988,10.922 h1.97 r180; Top Overlay "2" at 35.687,6.223 h1.97 r180; Top Overlay "1" at 35.687,8.763 h1.97 r180
USB: Top Overlay "V" at 93.98,45.72 h0.39 r180; Top Overlay "D-" at 93.98,46.482 h0.39 r180; Top Overlay "D+" at 93.98,47.117 h0.39 r180; Top Overlay "ID" at 93.98,47.752 h0.39 r180; Top Overlay "GND" at 93.98,48.387 h0.39 r180